# EAGLE board shiva (EAGLE 7.7.0)

Size 68.83 x 43.18 mm. Coordinates in mm from the lower left corner, seen from the top.
Outline: 0,0 68.83,0 68.83,43.18 0,43.18 0,0
Copper layers (1*16): Top 0.035mm / dielectric 1.5mm / Bottom 0.035mm
Design rules "default": minimum track width 10mil, minimum drill 24mil, track to track 8mil, track to pad 8mil, pad to pad 8mil, via to via 8mil, smd to smd 8mil, copper to edge 40mil, drill to drill 8mil, minimum pad ring 10mil, minimum via ring 8mil, stop-mask expansion 4mil, vias tented up to drill 0mil, thermal gap 10mil

## Footprints (pad centres in the part's own frame; a part is rotated, then mirrored left to right if it is on the bottom)
0805 = smd 0.8 x 1.4: 1 -1,0; 2 1,0
DM3D-SF = smd 0.7 x 1.75: CLK/SCK -1.2,-1.34; CMD/DI 1,-1.34; DAT0/DO -3.4,-1.34; DAT1 -4.45,-1.34; DAT2 3.2,-1.34; DAT3/CS 2.1,-1.34 | smd 0.8 x 1.5: GND1 -6,6.36 | smd 0.8 x 1.4: GND2 5.9,7.01 | smd 1.4 x 1.5: GND3 5.6,-1.24 | smd 1.3 x 1.5: GND4 -5.7,-1.24 | smd 1 x 1.55: SW_A 5.55,9.46 | smd 1.4 x 1: SW_B -5.7,7.86 | smd 0.7 x 2.032: VDD -0.1,-1.34; VSS -2.3,-1.34
ADAFRUIT_OLED_13 = drill 0.8 pad 1.422: 3V3 3.81,0; CLK -6.35,0; CS 1.27,0; DATA -8.89,0; DC -3.81,0; GND 8.89,0; RST -1.27,0; VIN 6.35,0
DOOBA_IONODE = drill 0.8 pad 1.422: 1 16.51,6.35; 2 13.97,6.35; 3 11.43,6.35; 4 8.89,6.35; 5 6.35,6.35; 6 3.81,6.35; 7 1.27,6.35; 8 -1.27,6.35; 9 -3.81,6.35; 10 -6.35,6.35; 11 -8.89,6.35; 12 -11.43,6.35; 13 -13.97,6.35; 14 -16.51,6.35; 15 -16.51,-6.35; 16 -13.97,-6.35; 17 -11.43,-6.35; 18 -8.89,-6.35; 19 -6.35,-6.35; 20 -3.81,-6.35; 21 -1.27,-6.35; 22 1.27,-6.35; 23 3.81,-6.35; 24 6.35,-6.35; 25 8.89,-6.35; 26 11.43,-6.35; 27 13.97,-6.35; 28 16.51,-6.35
JS102011 = smd 1.2 x 2.5: 1 -2.5,2.75; 2 0,2.75; 3 2.5,2.75 | hole 0.9: -3.4,0; 3.4,0
B3SL-10XXP = smd 2 x 1.7: 1 3.5,-2; 2 -3.5,-2; 3 3.5,2; 4 -3.5,2
20-VQFN = smd 0.45 x 0.26: 1 -1.85,1; 2 -1.85,0.5; 3 -1.85,0; 4 -1.85,-0.5; 5 -1.85,-1; 11 1.85,-1; 12 1.85,-0.5; 13 1.85,0; 14 1.85,0.5; 15 1.85,1 | smd 0.26 x 0.45: 6 -1,-1.85; 7 -0.5,-1.85; 8 0,-1.85; 9 0.5,-1.85; 10 1,-1.85; 16 1,1.85; 17 0.5,1.85; 18 0,1.85; 19 -0.5,1.85; 20 -1,1.85 | smd 2.7 x 2.7: PAD 0,0
DOOBA_AECHO_NOAOUT = drill 0.8 pad 1.422: 1 -20.32,6.35; 2 -20.32,3.81; 3 -20.32,1.27; 4 -20.32,-1.27; 5 -20.32,-3.81; 6 -20.32,-6.35; 7 20.32,-6.35; 8 20.32,-3.81; 9 20.32,-1.27; 10 20.32,1.27; 11 20.32,3.81; 12 20.32,6.35
DOOBA_NOMAD = drill 0.8 pad 1.422: 3 -8.89,-1.27; 4 -8.89,-3.81; 5 -8.89,-6.35; 6 8.89,-6.35; 7 8.89,-3.81; 8 8.89,-1.27; 9 8.89,3.81; 10 8.89,6.35
SOT23-5 = smd 0.66 x 1: 1 0.95,1.315; 2 0,1.315; 3 -0.95,1.315; 4 -0.95,-1.315; 5 0.95,-1.315

## Placement (x,y rotation side)
C1  1uF  [0805]  37.85,31.75 90 top
C2  1uF  [0805]  42.93,31.75 270 top
C3  10uF  [0805]  6.1,33.02 0 top
C4  100nF  [0805]  6.1,35.56 0 top
C5  100nF  [0805]  36.58,38.1 90 top
J1  DM3D-SFDM  [DM3D-SF]  3.56,24.13 270 top
J2  ADAFRUIT_OLED_13  [ADAFRUIT_OLED_13]  17.53,39.88 0 top
N1  DOOBA_IONODE  [DOOBA_IONODE]  21.34,7.62 0 bottom
R1  10k  [0805]  41.66,41.91 180 top
R2  10k  [0805]  37.85,41.91 0 top
S1  PWR  [JS102011]  65.79,6.35 90 top
SW1  TACTSWB3SL-10XXP  [B3SL-10XXP]  51.82,15.24 0 top
SW2  TACTSWB3SL-10XXP  [B3SL-10XXP]  40.39,24.13 0 top
SW3  TACTSWB3SL-10XXP  [B3SL-10XXP]  63.25,33.02 0 top
SW4  TACTSWB3SL-10XXP  [B3SL-10XXP]  63.25,24.13 0 top
SW5  TACTSWB3SL-10XXP  [B3SL-10XXP]  63.25,15.24 0 top
SW6  TACTSWB3SL-10XXP  [B3SL-10XXP]  51.82,33.02 0 top
SW7  TACTSWB3SL-10XXP  [B3SL-10XXP]  51.82,24.13 0 top
U1  MCP23008QFN  [20-VQFN]  40.39,38.1 0 top
U2  DOOBA_AECHO_NOAOUT  [DOOBA_AECHO_NOAOUT]  54.36,21.59 270 bottom
U3  DOOBA_NOMAD  [DOOBA_NOMAD]  25.15,30.48 180 bottom
U4  3.3V  [SOT23-5]  40.39,31.75 0 top

## Library data of the parts
C1-C5 J1 J2 N1 R1 R2 S1 SW1-SW7 U1-U4 = dooba

## Nets
3.3V: C2.2 C3.1 C4.1 C5.1 J1.VDD R1.2 R2.2 U1.1 U1.4 U1.18 U4.5
5.5V: C1.2 J2.VIN N1.15 U2.2 U3.3 U3.8 U4.1 U4.3
AMP_CLK: N1.19 U2.5
AMP_SHDN: N1.20 U2.4
AMP_VUPDN: N1.18 U2.6
GND: C1.1 C2.1 C3.2 C4.2 C5.2 J1.GND1 J1.GND2 J1.GND3 J1.GND4 J1.VSS J2.GND N1.1 N1.16 SW1.3 SW2.3 SW3.3 SW4.3 SW5.3 SW6.3 SW7.3 U1.2 U1.3 U1.17 U1.PAD U2.1 U2.3 U3.5 U3.6 U3.9 U4.2
I2C_SCL: J2.CLK N1.21 R1.1 U1.19 U2.12
I2C_SDA: J2.DATA N1.22 R2.1 U1.20 U2.11
MICROSD_CS: J1.DAT3/CS N1.14
MICROSD_MISO: J1.DAT0/DO N1.11
MICROSD_MOSI: J1.CMD/DI N1.13
MICROSD_SCK: J1.CLK/SCK N1.12
MP3_DREQ: N1.27 U2.8
MP3_RST: N1.28 U2.7
MP3_SCKR: N1.25 U2.10
MP3_SDI: N1.26 U2.9
N$1: SW1.1 U1.9
N$2: SW2.1 U1.10
N$3: SW3.1 U1.11
N$4: SW4.1 U1.12
N$5: SW5.1 U1.13
N$6: SW6.1 U1.14
N$7: SW7.1 U1.15
N$11: S1.1 U3.7
OLED_RST: J2.RST N1.17
VBAT: S1.2 U3.10
VUSB: N1.2 U3.4

## Tracks (layer width: path | path; a pad name or v marks a point on that pad's centre or on a via)
3.3V  (10 unrouted)
5.5V  (7 unrouted)
AMP_CLK  (1 unrouted)
AMP_SHDN  (1 unrouted)
AMP_VUPDN  (1 unrouted)
GND  (29 unrouted)
I2C_SCL  (4 unrouted)
I2C_SDA  (4 unrouted)
MICROSD_CS  (1 unrouted)
MICROSD_MISO  (1 unrouted)
MICROSD_MOSI  (1 unrouted)
MICROSD_SCK  (1 unrouted)
MP3_DREQ  (1 unrouted)
MP3_RST  (1 unrouted)
MP3_SCKR  (1 unrouted)
MP3_SDI  (1 unrouted)
N$1  (1 unrouted)
N$2  (1 unrouted)
N$3  (1 unrouted)
N$4  (1 unrouted)
N$5  (1 unrouted)
N$6  (1 unrouted)
N$7  (1 unrouted)
N$11  (1 unrouted)
OLED_RST  (1 unrouted)
VBAT  (1 unrouted)
VUSB  (1 unrouted)